# Altium PCB rad_detector_v500.PcbDoc
Units mil, origin at the board's own origin, x right, y up, seen from the top; angles counter-clockwise.
Board outline 2401.57 x 3149.61 mil, 2 copper layers (Top Layer, Bottom Layer), stack 64.611 mil thick; 105 components, 77 nets, 339 pads, 128 vias.
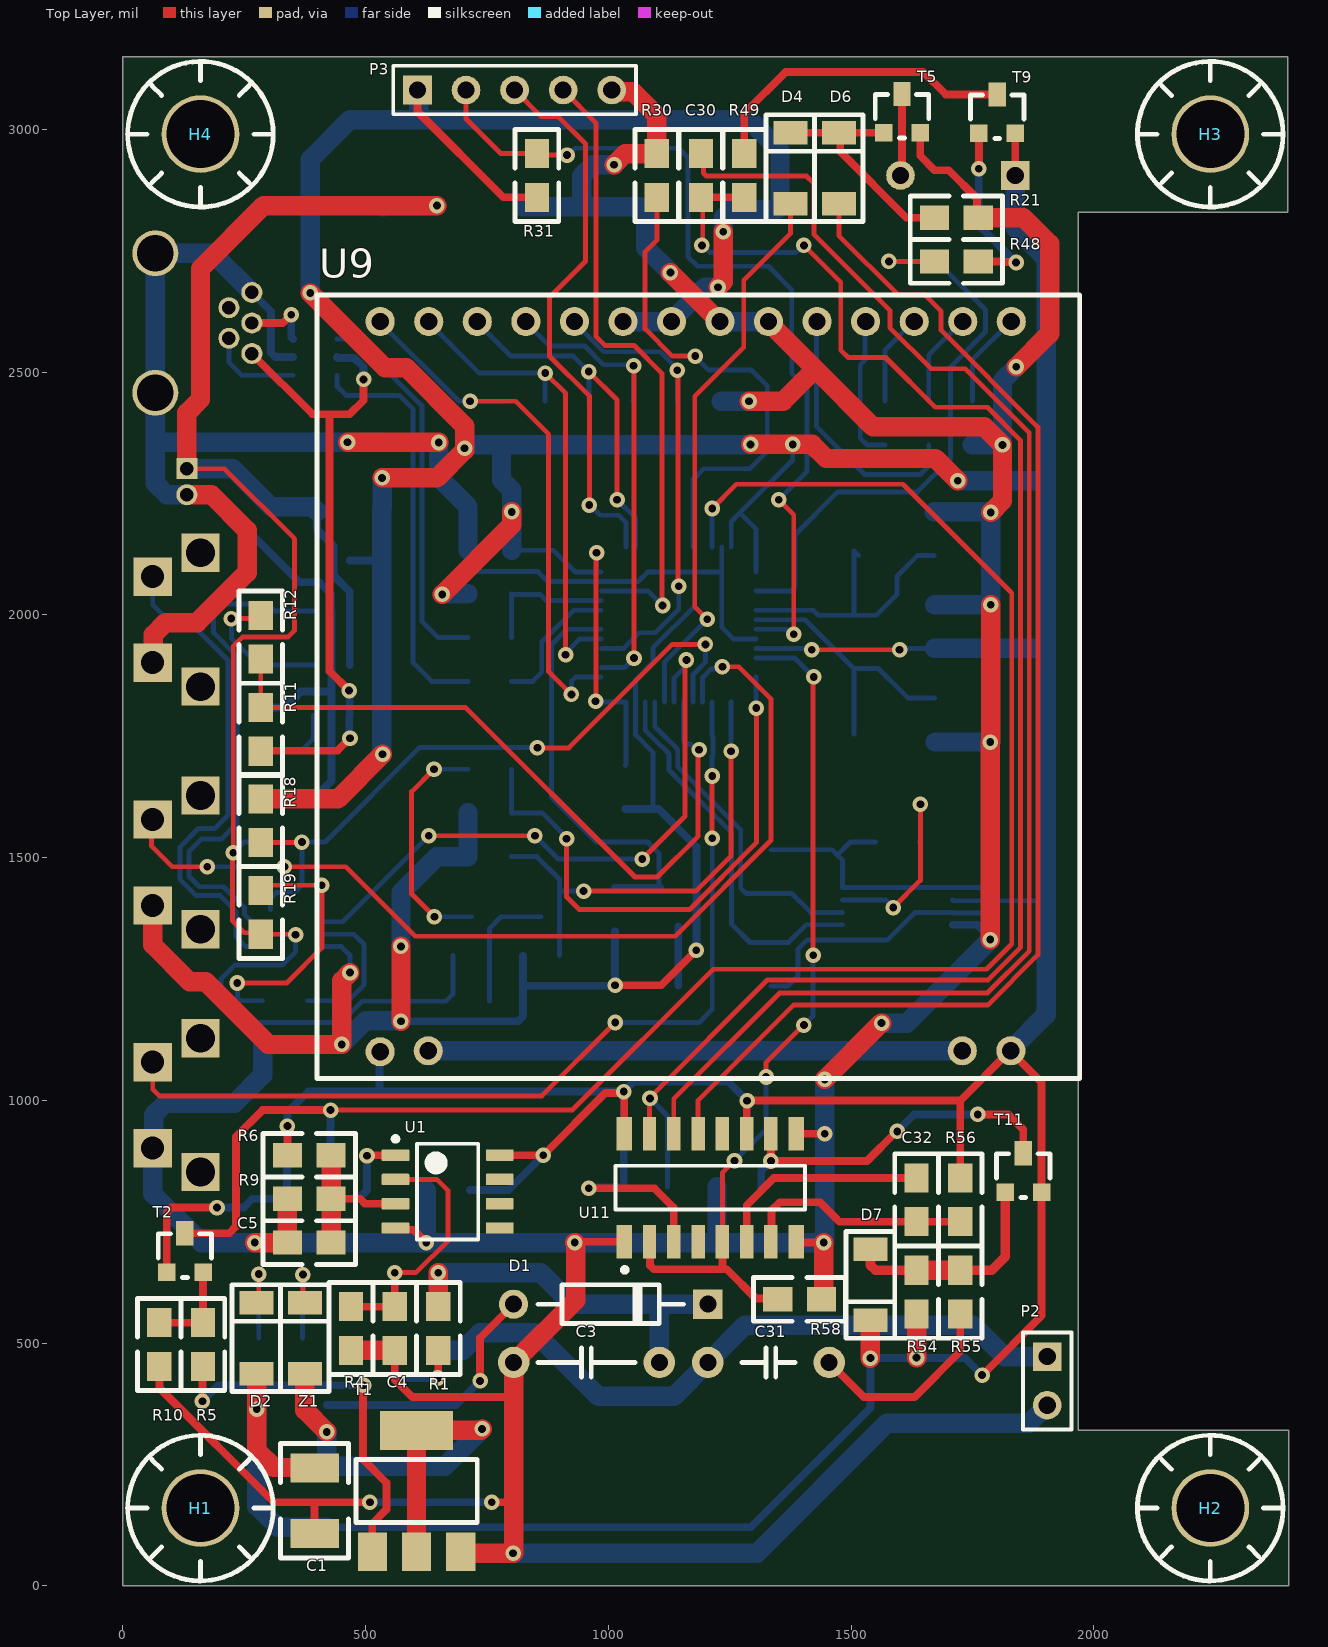
[diagram p0: Top Layer view]
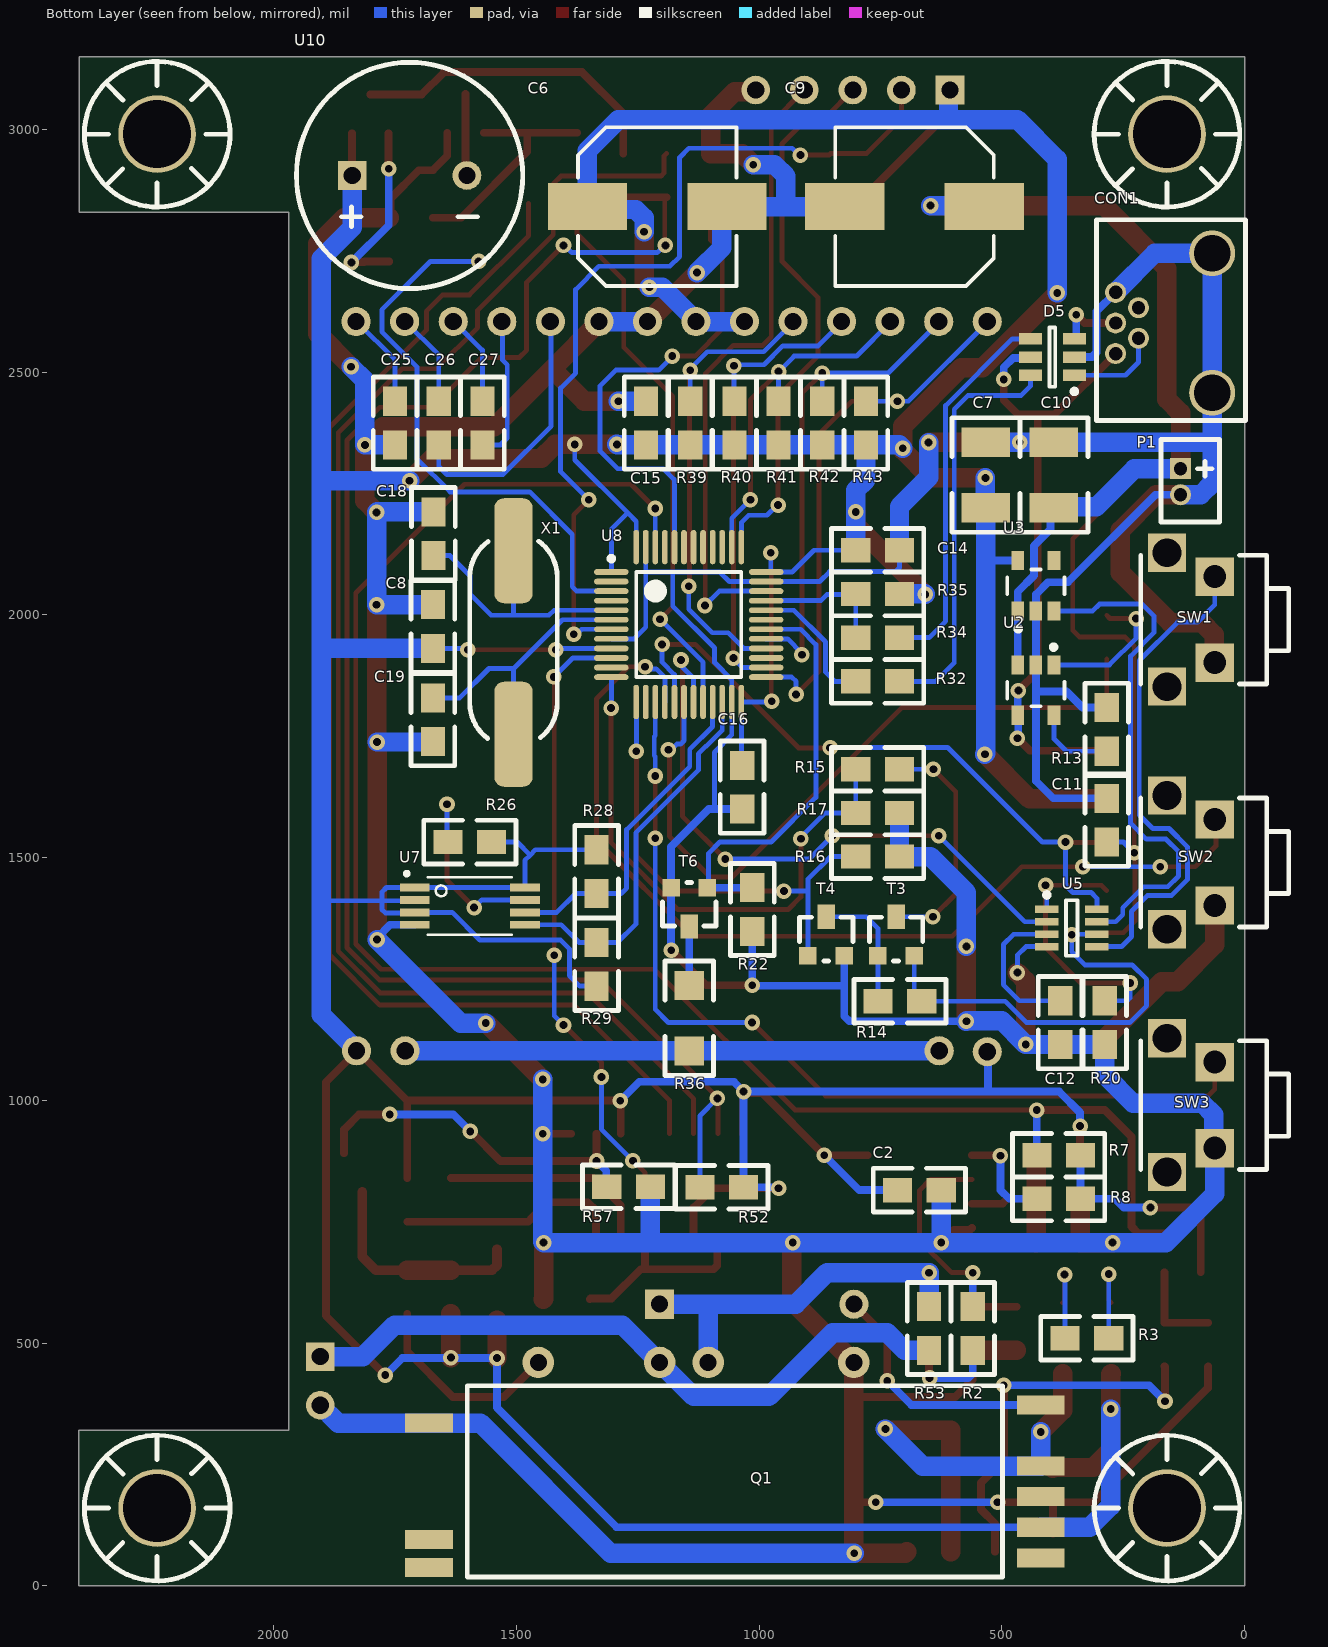
[diagram p1: Bottom Layer view, seen from below]
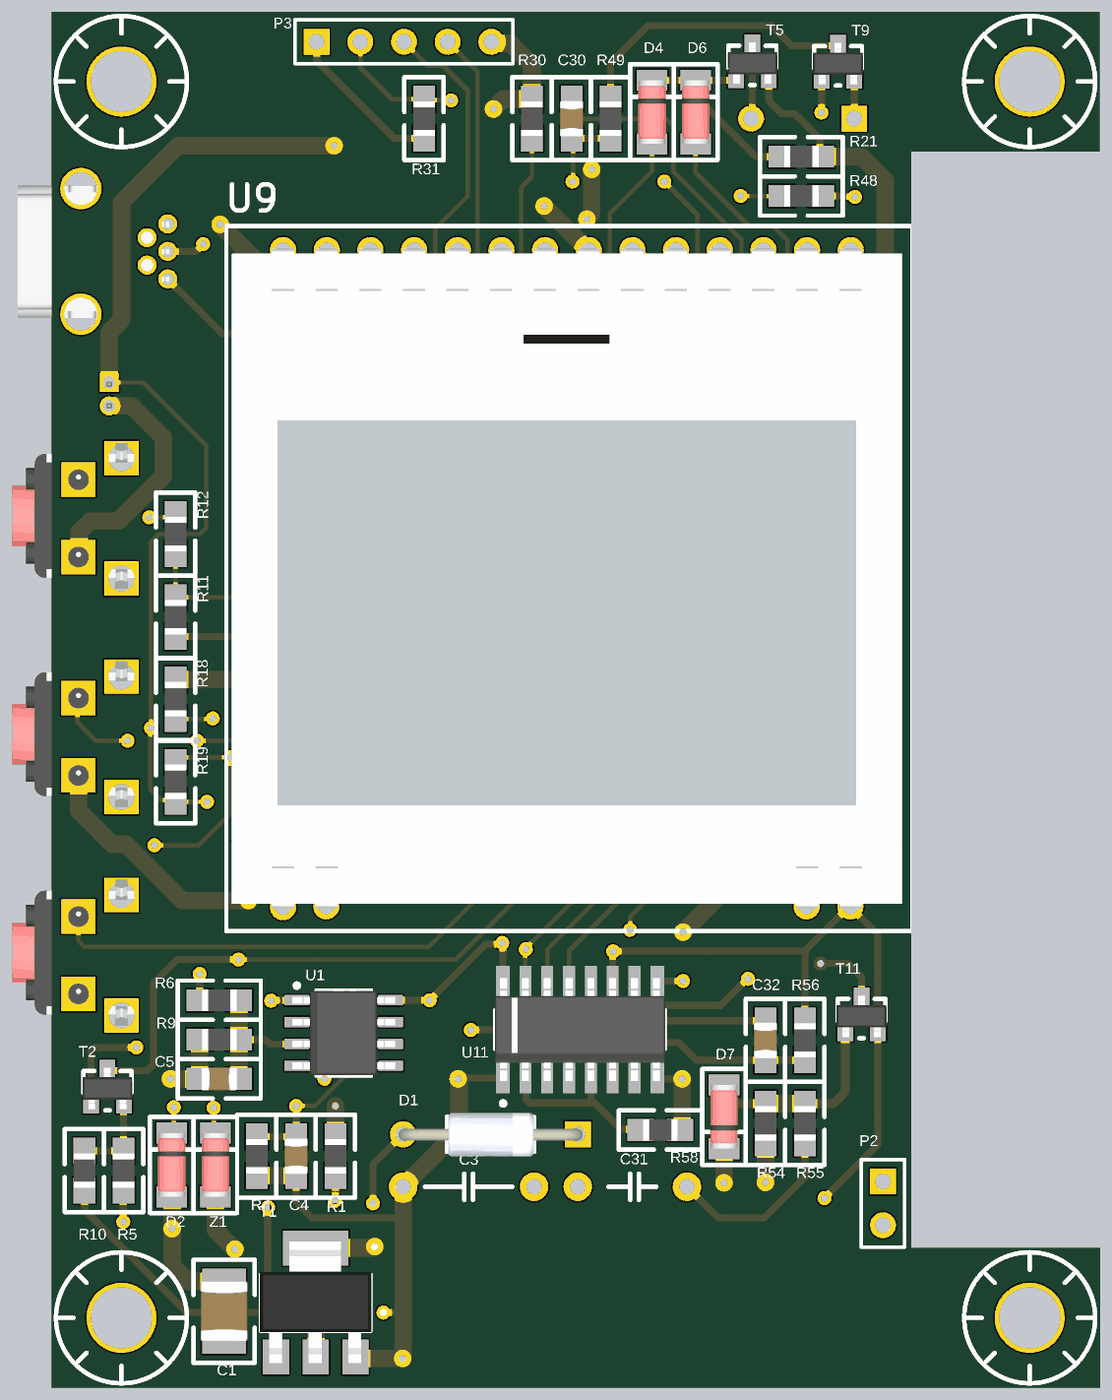
[diagram p2: 3D render of the assembled board from above, using the file's embedded part models]
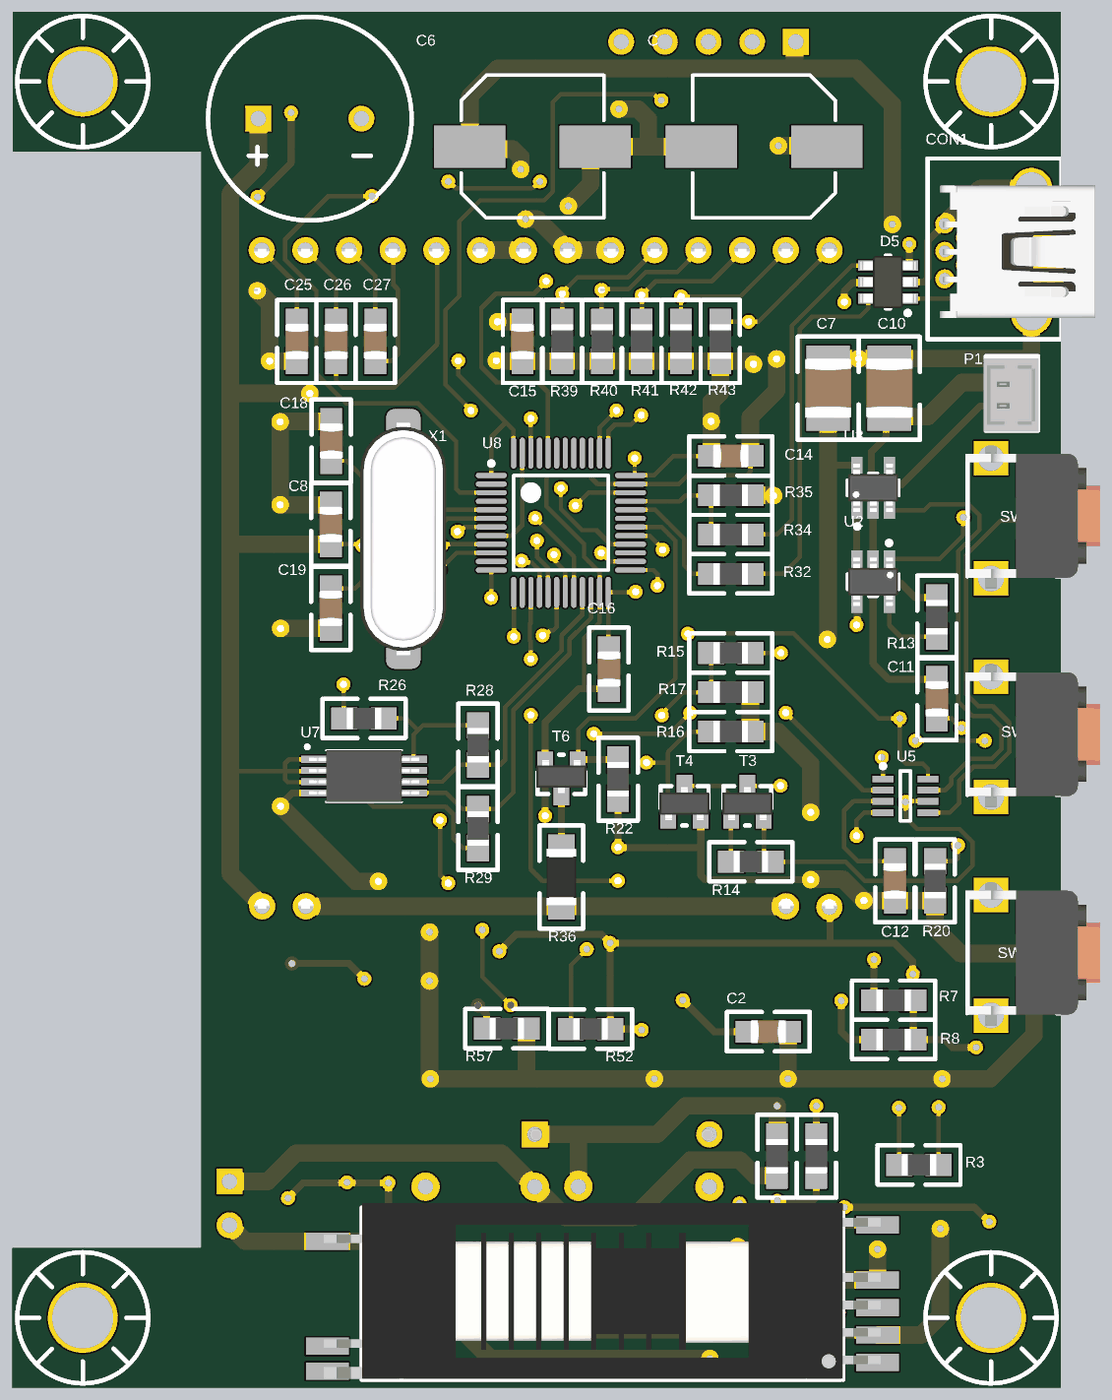
[diagram p3: 3D render of the assembled board from below, using the file's embedded part models]

## Layer stack, top to bottom
Top Solder: solder mask 0.4, Solder Resist, Dk 3.5
Top Layer: signal copper 1.4
Dielectric 1: dielectric 61.811, FR-4, Dk 4.8
Bottom Layer: signal copper 1.4
Bottom Solder: solder mask 0.4, Solder Resist, Dk 3.5

## Board outline
0,0 0,3149.61 2400,3149.61 2400,2829 1968.5,2829 1968.5,320 2401.57,320 2401.57,0

## Design rules (kind name [scope] priority, off if disabled: settings)
Clearance [All] p1: gap=10 ignorepadtopadclearanceinfootprint=FALSE except(0: THPad-Hole Via-Hole Fill-Hole Poly-Hole Region-Hole Text-Hole; 7.87: SMDPad-SMDPad SMDPad-THPad SMDPad-Via SMDPad-Fill SMDPad-Poly SMDPad-Region SMDPad-Text SMDPad-Hole; 8: Arc-Arc Arc-Track Arc-SMDPad Arc-THPad Arc-Via Arc-Fill Arc-Poly Arc-Region Arc-Text Arc-Hole Track-Track Track-SMDPad Track-THPad Track-Via Track-Fill Track-Poly Track-Region Track-Text Track-Hole)
HoleSize [All] p1: absolutevalues=TRUE maxlimit=248.03 minlimit=11.81 maxpercent=80.000 minpercent=20.000
PolygonConnect [All] p1: connectstyle=Relief reliefconductorwidth=10 reliefentries=4 polygonreliefangle="90 Angle" airgapwidth=10
RoomDefinition U_rad_detector_v500_PSU [InComponentClass('U_rad_detector_v500_PSU')] p1 off: confinementstyle=ConfineIn formatcopy=TRUE lockcomponents=FALSE outline 2543.23,5485.4 8643.23,5485.4 8643.23,6145.4 2543.23,6145.4
RoomDefinition U_rad_detector_v500_HV_PSU [InComponentClass('U_rad_detector_v500_HV_PSU')] p2 off: confinementstyle=ConfineIn formatcopy=TRUE lockcomponents=FALSE outline 2545,1518 7995,1518 7995,3008 2545,3008
RoomDefinition U_rad_detector_v500_CONN [InComponentClass('U_rad_detector_v500_CONN')] p3 off: confinementstyle=ConfineIn formatcopy=TRUE lockcomponents=FALSE outline 2555,548 7235,548 7235,1478 2555,1478
RoomDefinition U_rad_detector_v500_ANA [InComponentClass('U_rad_detector_v500_ANA')] p4 off: confinementstyle=ConfineIn formatcopy=TRUE lockcomponents=FALSE outline 2545,-32 6575,-32 6575,508 2545,508
RoomDefinition U_rad_detector_v500_MCU [InComponentClass('U_rad_detector_v500_MCU')] p5 off: confinementstyle=ConfineIn formatcopy=TRUE lockcomponents=FALSE outline 2545,3048 7285,3048 7285,3628 2545,3628
RoomDefinition U_rad_detector_v500_PERIPHERAL [InComponentClass('U_rad_detector_v500_PERIPHERAL')] p6 off: confinementstyle=ConfineIn formatcopy=TRUE lockcomponents=FALSE outline 2545,3668 10385,3668 10385,5418 2545,5418
RoutingVias [All] p1: holewidth=16 width=32 viastyle="Through Hole" minholewidth=16 minwidth=32 maxholewidth=16 maxwidth=32
SilkToSilkClearance [All] p1 off: silktosilkclearance=10
SolderMaskExpansion [All] p1: expansion=4 istentingtop=FALSE
Width [All] p1: maxlimit=40 minlimit=10 preferedwidth=16 minimp=50.000000 maximp=50.000000 favimp=50.000000
28 further rules are at their usual default settings.

## Classes and differential pairs
component class rad_detector_v500_MAIN: H1 H2 H3 H4
component class U_rad_detector_v500_PSU: C6 C7 C8 C9 C10 C11 C12 R11 R12 R13 R14 R15 R16 R17 R18 R19 R20 T3 T4 U2 U3 U5
component class U_rad_detector_v500_PERIPHERAL: C25 C26 C27 R21 R22 R36 R39 R40 R41 R42 R43 SW1 SW2 SW3 T5 T6 U9 U10
component class U_rad_detector_v500_MCU: C14 C15 C16 C18 C19 D4 R26 R28 R29 R30 R31 U7 U8 X1
component class U_rad_detector_v500_HV_PSU: C1 C2 C3 C4 C5 D1 D2 Q1 R1 R2 R3 R4 R5 R6 R7 R8 R9 R10 T1 T2 U1 Z1
component class U_rad_detector_v500_CONN: CON1 D5 P1 P2 P3 R32 R34 R35
component class U_rad_detector_v500_ANA: C30 C31 C32 D6 D7 R48 R49 R52 R53 R54 R55 R56 R57 R58 T9 T11 U11

## Components (designator, comment, footprint, x,y, rotation, side; value= is the part's Value field where it differs from the comment)
C1 "10uF" 1210_C 390,175 r270 top
C2 "100nF" 0805_C 670,815 r180 bottom
C3 "10nF" CAPACITOR_300MIL 955,460 r180 top
C4 "10nF" 0805_C 560,530 r270 top
C5 "100nF" 0805_C 384,707 r0 top
C6 "470uF" CAPAE9383X110M 1210,2841 r180 bottom
C7 "10uF" 1210_C 538,2288 r270 bottom
C8 "100nF" 0805_C 1672,1976 r270 bottom
C9 "470uF" CAPAE9383X110M 680,2841 r0 bottom
C10 "10uF" 1210_C 398,2288 r270 bottom
C11 "100nF" 0805_C 284,1577 r270 bottom
C12 "10uF" 0805_C 380,1160 r270 bottom
C14 "100nF" 0805_C 756,2133 r0 bottom
C15 "100nF" 0805_C 1233,2395 r90 bottom
C16 "100nF" 0805_C 1035,1645 r90 bottom
C18 "22pF" 0805_C 1671,2167 r90 bottom
C19 "22pF" 0805_C 1672,1784 r270 bottom
C25 "1uF" 0805_C 1750,2395 r90 bottom
C26 "1uF" 0805_C 1660,2395 r90 bottom
C27 "1uF" 0805_C 1570,2395 r90 bottom
C30 "100nF" 0805_C 1191,2905 r270 top
C31 "68pF" CAPACITOR_250MIL 1335,460 r0 top
C32 "10nF" 0805_C 1635,795 r270 top
CON1 "USB-MINI" USB-MINI 155,2604 r90 bottom
D1 "DIODE" DIODE_400MIL 1000,585 r180 top
D2 "DIODE" SMD_DIODE_SOD80 275,515 r270 top
D4 "DIODE" SMD_DIODE_SOD80 1375,2925 r270 top
D5 "USBLC6-2SC6" STM-SOT23-6L_V 396,2531 r0 bottom
D6 "DIODE" SMD_DIODE_SOD80 1475,2925 r270 top
D7 "DIODE" SMD_DIODE_SOD80 1540,615 r90 top
H1 "HOLE" HOLE_140_160MIL 160,165 r0 top
H2 "HOLE" HOLE_140_160MIL 2240,165 r0 top
H3 "HOLE" HOLE_140_160MIL 2240,2995 r0 top
H4 "HOLE" HOLE_140_160MIL 160,2995 r0 top
P1 "LP602945_CONN" LP602945_CONN 127,2276 r270 bottom
P2 "GM TUBE" HDR1X2 1904,472 r270 top
P3 "Header 5" HDR1X5 607,3081 r0 top
Q1 "DARFON_CCFL_TRANSFORMER" DARFON_CCFL_TRANSFORMER 1060.08,205.08 r0 bottom
R1 "30M" 0805 650,530 r90 top
R2 "30M" 0805 560,530 r270 bottom
R3 "150" 0805 325,510 r180 bottom
R4 "200k" 0805 470,530 r90 top
R5 "1k" 0805 165,497 r90 top
R6 "15k" 0805 384,887 r180 top
R7 "15k" 0805 383,887 r0 bottom
R8 "1k" 0805 383,797 r180 bottom
R9 "15k" 0805 384,797 r0 top
R10 "10k" 0805 75,497 r90 top
R11 "47k" 0805 284,1764 r270 top
R12 "91k" 0805 284,1954 r270 top
R13 "2k" 0805 284,1764 r90 bottom
R14 "10k" 0805 710,1204 r180 bottom
R15 "10k" 0805 756,1682 r180 bottom
R16 "10k" 0805 756,1502 r0 bottom
R17 "3.3k" 0805 756,1592 r0 bottom
R18 "10k" 0805 284,1576 r90 top
R19 "33k" 0805 284,1387 r270 top
R20 "10k" 0805 288,1160 r90 bottom
R21 "10k" 0805 1717,2818 r180 top
R22 "10k" 0805 1014,1393 r90 bottom
R26 "-" 0805 1596,1532 r0 bottom
R28 "10k" 0805 1335,1471 r90 bottom
R29 "10k" 0805 1335,1280 r270 bottom
R30 "100k" 0805 1100,2905 r270 top
R31 "10k" 0805 853,2905 r90 top
R32 "22" 0805 756,1863 r0 bottom
R34 "22" 0805 756,1953 r0 bottom
R35 "1.5k" 0805 756,2043 r0 bottom
R36 "22" 1206 1149,1174 r270 bottom
R39 "10k" 0805 1142,2395 r90 bottom
R40 "10k" 0805 1051,2395 r90 bottom
R41 "10k" 0805 960,2395 r90 bottom
R42 "10k" 0805 870,2395 r90 bottom
R43 "10k" 0805 780,2395 r90 bottom
R48 "36k" 0805 1717,2728 r0 top
R49 "220k" 0805 1280,2905 r90 top
R52 "220k" 0805 1077,821 r180 bottom
R53 "4.7M" 0805 650,530 r90 bottom
R54 "3.9k" 0805 1635,605 r90 top
R55 "100k" 0805 1725,605 r270 top
R56 "36k" 0805 1725,795 r90 top
R57 "10k" 0805 1269,822 r180 bottom
R58 "10k" 0805 1394,590 r180 top
SW1 "DTSA 62N" SW_DTSA-62N 160,1990 r90 bottom
SW2 "DTSA 62N" SW_DTSA-62N 160,1490 r90 bottom
SW3 "DTSA 62N" SW_DTSA-62N 160,990 r90 bottom
T1 "BCP54" SOT233-1 605,200 r0 top
T2 "BC848*" SOT23 128,680 r0 top
T3 "BSS84" SOT23 718,1332 r180 bottom
T4 "MMBF170" SOT23 862,1332 r180 bottom
T5 "MMBF170" SOT23 1605,3027 r0 top
T6 "MMBF170" SOT23 1144,1404 r0 bottom
T9 "BC856" SOT23 1801,3026 r0 top
T11 "BC856" SOT23 1855,845 r0 top
U1 "LM393D" SO-8 669,812 r0 top
U2 "MCP73832T-2ATI/OT" SOT23-5 430,1845 r270 bottom
U3 "MIC5504-3.3YM5-TR" SOT23-5 430,2060 r90 bottom
U5 "LTC2955CTS8-1#TRPBF" LT-TS8-8-TSOT-23_V 356,1355 r180 bottom
U7 "M24C02-DRDW8TP/K" TSSOP8 1596,1400 r180 bottom
U8 "STM32F103CBT6" STM-LQFP48_N 1145,1980 r180 bottom
U9 "EADOGS102W-6(with Backlight)" EADOGS102-6W 1191.57,1852.01 r0 top
U10 "HCM1212X" HCM1212X 1720,2905 r180 bottom
U11 "74HCT123" 74HCT123 1210,820 r90 top
X1 "XTAL" XTAL_SMD 1506,1943 r90 bottom
Z1 "DIODE_ZENER" SMD_DIODE_SOD80 375,515 r270 top

## Footprints (in the part's own frame and the unit in brackets; to place one, negate y for a bottom-side part, rotate by r counter-clockwise, add the part's x,y. Pads: shape width x height; smd on the part's side, far side on the other; paste and mask are expansions set on the pad)
74HCT123 [mm]
  rect 1.75x0.8 smd paste+0 mask+0: 1(-2.825,4.495) 8(-2.825,-4.495) 9(2.825,-4.495) 16(2.825,4.495)
  rect 1.75x0.7 smd paste+0 mask+0: 2(-2.825,3.175) 3(-2.825,1.905) 4(-2.825,0.635) 5(-2.825,-0.635) 6(-2.825,-1.905) 7(-2.825,-3.175) 10(2.825,-3.175) 11(2.825,-1.905) 12(2.825,-0.635) 13(2.825,0.635) 14(2.825,1.905) 15(2.825,3.175)
  silkscreen extent -4.42,-4.95 1.15,4.95, body extent -3,-4.95 3,4.95, height 1.76
0805 [mil]
  rect 60x50 smd: 1(-45,0) 2(45,0)
  silkscreen extent -95,-45 95,45, body extent -39,-25 39,25, height 24
0805_C [mil]
  rect 60x50 smd: 1(-45,0) 2(45,0)
  silkscreen extent -95,-45 95,45, body extent -41,-27 41,27, height 30
1206 [mil]
  rect 60x60 smd: 1(-62.5,5) 2(72.5,5)
  silkscreen extent -113,-45 123,55, body extent -60,-28 70,38, height 26
1210_C [mil]
  rect 60x100 smd: 1(-67.5,5) 2(67.5,5)
  silkscreen extent -118,-65 118,75, body extent -69,-48 69,58, height 57
CAPACITOR_250MIL [mil]
  round 65 hole 35: 1(-130,0) 2(120,0)
  silkscreen extent -60,-30 50,30
CAPACITOR_300MIL [mil]
  round 65 hole 35: 1(-150,0) 2(150,0)
  silkscreen extent -100,-30 100,30
CAPAE9383X110M [mm] "Aluminum Electrolytic Capacitor, Body 8,30x8,30x11,00mm, IPC Low Density"
  rect 4.15x2.45 smd: 1(-3.65,0) 2(3.65,0)
  silkscreen extent -4.15,-4.15 4.15,4.15, body extent -4.15,-4.15 4.15,4.15, height 11
DARFON_CCFL_TRANSFORMER [mm]
  rect 2.5x1 smd: 1(-16.254,3.746) 2(-16.254,2.146) 3(-16.254,0.546) 4(-16.254,-1.054) 5(15.746,2.796) 6(-16.254,-4.254) 7(15.746,-3.304) 8(15.746,4.246)
  silkscreen extent -14.25,-5.25 13.75,4.75, body extent -16.45,-5.51 15.95,4.7, height 5.22
DIODE_400MIL [mil]
  rect 60x60 / inner round 60 / far side rect 60x60 hole 35: 1(-205,5)
  round 60 hole 35: 2(195,5)
  silkscreen extent -155,-35 145,45, body extent -216,-43 205,55, height 101
EADOGS102-6W [mm]
  round 1.524 hole 0.9: 1(-16.8,-19.1) 2(-14.285,-19.05) 13(13.655,-19.05) 14(16.195,-19.05) 15(16.22,19.1) 16(13.68,19.1) 17(11.14,19.1) 18(8.6,19.1) 19(6.06,19.1) 20(3.52,19.1) 21(0.98,19.1) 22(-1.56,19.1) 23(-4.1,19.1) 24(-6.64,19.1) 25(-9.18,19.1) 26(-11.72,19.1) 27(-14.26,19.1) 28(-16.8,19.1)
  silkscreen extent -20.1,-20.5 19.8,20.5, body extent -19.8,-19.2 19.5,19.2, height 5.6
HCM1212X [mm]
  rect 1.5x1.5 hole 0.9: 1(-3,0)
  round 1.5 hole 0.9: 2(3,0)
  silkscreen extent -5.92,-5.92 5.92,5.92, body extent -5.92,-5.92 5.92,5.92, height 8.92
HDR1X2 [mm] "Connector; Header; 2 Position"
  rect 1.5x1.5 hole 0.9: 1(0,0)
  round 1.5 hole 0.9: 2(2.54,0)
  silkscreen extent -1.27,-1.27 3.81,1.27
HDR1X5 [mm] "Connector; Header; 5 Position"
  rect 1.5x1.5 hole 0.9: 1(0,0)
  round 1.5 hole 0.9: 2(2.54,0) 3(5.08,0) 4(7.62,0) 5(10.16,0)
  silkscreen extent -1.27,-1.27 11.43,1.27
HOLE_140_160MIL [mil]
  round 160 hole 140 unplated: 1(0,-5)
  silkscreen extent -150,-155 150,145
LP602945_CONN [mm]
  rect 1.1x1.1 hole 0.7: 1(-0.635,-0.127)
  round 1.1 hole 0.7: 2(0.727,-0.127)
  silkscreen extent -2.16,-1.14 2.16,1.91, body extent -2.03,-1.27 2.22,1.93, height 4.21
LT-TS8-8-TSOT-23_V [mm] "SOT23, 8-Leads, Body 2.9x1.75mm, Pitch 0.65mm"
  rect 1.22x0.4 smd: 1(-1.31,0.975) 2(-1.31,0.325) 3(-1.31,-0.325) 4(-1.31,-0.975) 5(1.31,-0.975) 6(1.31,-0.325) 7(1.31,0.325) 8(1.31,0.975)
  silkscreen extent -1.43,-1.45 0.3,1.85, body extent -0.87,-1.45 0.88,1.45, height 1
SMD_DIODE_SOD80 [mil]
  rect 48x70 smd: 1(-68,0) 2(78,0)
  silkscreen extent -105,-50 115,50, body extent -68,-32 78,32, height 63
SO-8 [mm] "SOIC, 8-Leads, Body 5x4mm, Pitch 1.27mm, IPC Medium Density"
  rrect17% 1.45x0.6 smd: 1(-2.725,1.905) 2(-2.725,0.635) 3(-2.725,-0.635) 4(-2.725,-1.905) 5(2.725,-1.905) 6(2.725,-0.635) 7(2.725,0.635) 8(2.725,1.905)
  silkscreen extent -2.85,-2.5 1.6,2.88, body extent -3,-2.45 3,2.45, height 1.63
SOT23 [mil]
  rect 36x36 smd: 1(-37.5,-34) 2(37.5,-34)
  rect 36x50 smd: 3(0,46)
  silkscreen extent -55,-45 55,45, body extent -57,-42 57,52, height 44
SOT23-5 [mm]
  rect 1x0.66 smd paste+0 mask+0: 1(-1.315,0.95) 2(-1.315,0) 3(-1.315,-0.95) 4(1.315,-0.95) 5(1.315,0.95)
  silkscreen extent -2.37,-1.5 0.85,1.5, body extent -1.4,-1.45 1.4,1.45, height 1.45
SOT233-1 [mil]
  rect 60x80 smd: 1(-91,-130) 2(0,-130) 3(91,-130)
  rect 150x80 smd: 4(0,120)
  silkscreen extent -125,-70 125,60, body extent -128,-144 128,135, height 63
STM-LQFP48_N [mm] "QFP, 48-Leads, Body 7x7mm, Pitch 0.5mm, IPC Medium Density"
  oval 1.8x0.3 smd: 1(-4.05,2.75) 2(-4.05,2.25) 3(-4.05,1.75) 4(-4.05,1.25) 5(-4.05,0.75) 6(-4.05,0.25) 7(-4.05,-0.25) 8(-4.05,-0.75) 9(-4.05,-1.25) 10(-4.05,-1.75) 11(-4.05,-2.25) 12(-4.05,-2.75) 25(4.05,-2.75) 26(4.05,-2.25) 27(4.05,-1.75) 28(4.05,-1.25) 29(4.05,-0.75) 30(4.05,-0.25) 31(4.05,0.25) 32(4.05,0.75) 33(4.05,1.25) 34(4.05,1.75) 35(4.05,2.25) 36(4.05,2.75)
  oval 0.3x1.8 smd: 13(-2.75,-4.05) 14(-2.25,-4.05) 15(-1.75,-4.05) 16(-1.25,-4.05) 17(-0.75,-4.05) 18(-0.25,-4.05) 19(0.25,-4.05) 20(0.75,-4.05) 21(1.25,-4.05) 22(1.75,-4.05) 23(2.25,-4.05) 24(2.75,-4.05) 37(2.75,4.05) 38(2.25,4.05) 39(1.75,4.05) 40(1.25,4.05) 41(0.75,4.05) 42(0.25,4.05) 43(-0.25,4.05) 44(-0.75,4.05) 45(-1.25,4.05) 46(-1.75,4.05) 47(-2.25,4.05) 48(-2.75,4.05)
  silkscreen extent -4.18,-2.75 2.75,3.57, body extent -4.45,-4.53 4.55,4.47, height 1.5
STM-SOT23-6L_V [mm] "SOT23, 6-Leads, Body 3.05x1.75mm, Pitch 0.95mm"
  rect 1.2x0.6 smd: 1(-1.15,0.95) 2(-1.15,0) 3(-1.15,-0.95) 4(1.15,-0.95) 5(1.15,0) 6(1.15,0.95)
  silkscreen extent -1.27,-1.55 0.15,1.92, body extent -1.6,-1.53 1.6,1.53, height 1.45
SW_DTSA-62N [mm]
  rect 2x2 hole 1.2: 1(-2.25,-2.5) 2(2.25,-2.5)
  rect 2x2 hole 1.5: 3(3.5,0) 4(-3.5,0)
  silkscreen extent -3.37,-6.37 3.37,1.37, body extent -4.1,-6.35 4.4,1.5, height 7.2
TSSOP8 [mm]
  rect 1.56x0.41 smd: 1(-2.88,0.975) 2(-2.88,0.325) 3(-2.88,-0.325) 4(-2.88,-0.975) 5(2.88,-0.975) 6(2.88,-0.325) 7(2.88,0.325) 8(2.88,0.975)
  silkscreen extent -3.4,-1.5 2.2,1.8, body extent -3.2,-1.5 3.2,1.5, height 1.2
USB-MINI [mm]
  round 1.1 hole 0.7: 1(-1.673,2.816) 2(-0.873,1.616) 3(-0.073,2.816) 4(0.727,1.616) 5(1.527,2.816)
  round 2.4 / inner round 1.524 / far side round 2.4 hole 1.9: 6(-3.723,-2.234) 7(3.577,-2.234)
  silkscreen extent -5.18,-3.99 5.33,3.82, body extent -3.94,-5.9 3.76,3.1, height 3.9
XTAL_SMD [mm]
  rrect50% 5.5x2 smd: 1(-4.8,0) 2(4.8,0)
  silkscreen extent -5.02,-2.29 5.3,2.29, body extent -6.75,-2.5 6.75,2.5, height 4.3

## Part data
C1 C2 C3 C4 C5 C7 C8 C10 C11 C12 C14 C15 C16 C18 C19 C25 C26 C27 C30 C31 C32: library part CAPACITOR
C6 C9: library part CAPACITOR_ELCO
D5: "Very low capacitance ESD protection, 3.5 pF, -40 to 125 degC, 6-Pin SOT23, RoHS, Tape and Reel", Capacitance Value=3.5pF, Clamping Voltage=17V, Leakage Current=0.15uA, Manufacturer=STMicroelectronics, Operating Temp Range=-40Cto125C, Operating Temperature Classification=Automotive, Operating Temperature Max Deg. C=125C, Operating Temperature Min Deg. C=-40C, Package / Case=SOT-23, Package Description="6-Pin Small Outline Transistor, Body 2.925 x 1.625 mm, Pitch 0.95 mm", Package Reference=SOT23-6L, Peak Pulse Current=5A, Reverse Breakdown Voltage=6V, Reverse Stand-off Voltage=5V, Test Current (It)=1mA, Clamping Voltage (Max)=17V, Configuration=Dual, Datasheet URL=http://www.st.com/st-web-ui/static/active/en/resource/technical/document/datasheet/CD00050750.pdf, Datasheet Version="Rev. 5, 10/2011", Direction Type=Uni-Directional, Leakage Current (Max)=0.15uA, Manufacturer URL=http://www.st.com/, Mounting=SurfaceMount, Mounting Style=SurfaceMount, Number of Elements=1, Packaging=TapeandReel, Pin Count=6, Polarity=Uni-Directional, Product Depth (mm)=1.75mm, Product Height (mm)=1.3mm, Product Length (mm)=3.05mm, Rad Hardened=No, Suppressor Type=DiodeArrays, Working Voltage=5V, Working Voltage (Max)=5V
P2: library part "Header 2", "Header, 2-Pin", LatestRevisionDate=17-Jul-2002, LatestRevisionNote="Re-released for DXP Platform.", Publisher="Altium Limited"
P3: "Header, 5-Pin", LatestRevisionDate=17-Jul-2002, LatestRevisionNote="Re-released for DXP Platform.", Publisher="Altium Limited"
R1 R2 R3 R4 R5 R6 R7 R8 R9 R10 R11 R12 R13 R14 R15 R16 R17 R18 R19 R20 R21 R22 R26 R28 R29 R30 R31 R32 R34 R35 R36 R39 R40 R41 R42 R43 R48 R49 R52 R53 R54 R55 R56 R57 R58: library part RESISTOR, Parameter 1=10k
SW1 SW2 SW3: library part "SW_DTSA 62N"
T2: library part TRANSISTOR_NPN
T3: "P-Chanel MOSFET"
T4 T5 T6: "N MOSFET"
T9 T11: library part TRANSISTOR_PNP
U1: "IC VOLT COMPARATOR DUAL LP 8SOIC", Ambient Temperature Range High=+70°C, Ambient Temperature Range Low=0°C, Input Bias Current=0.02uA, Input Offset Voltage=1mV, Manufacturer=STMicroelectronics, Max Dual Supply Voltage=18V, Max Junction Temp=+150°C, Max Supply Voltage=36V, Min Dual Supply Voltage=1V, Min Supply Voltage=2V, Nominal Supply Current=0.45-0.6mA, Output Current per Channel=18mA, Package=SO8, Temperature="0°C to +70°C", Voltage Gain=200V/mV, Automotive=No, Category=IC, ComponentLink2Description=Datasheet, ComponentLink2URL=https://www.st.com/resource/en/datasheet/lm393.pdf, Device Class L1="Integrated Circuits (ICs)", Device Class L2="Linear ICs", Device Class L3=Comparators, Digikey Description="IC VOLT COMPARATOR DUAL LP 8SOIC", Footprint Url=https://www.st.com/resource/en/datasheet/stm8l001j3.pdf, Height=1.75mm, Lead Free=Yes, Manufacturer Part Number=LM393D, Mouser Description="Analog Comparators Lo-Pwr Dual Voltage", Number of Channels=2, Octopart=https://octopart.com/lm393d-stmicroelectronics-25832, Response Time=1.3us, RoHS=TRUE, Standoff Height=0.1mm, Temperature Range High=+70°C, Temperature Range Low=0°C
U2: "Miniature Single-Cell, Fully Integrated Li-Ion, Li-Polymer Charge Management Controller, 4.2V, 5-Pin SOT-23, Industrial Temperature, Tape and Reel"
U5: library part LTC2955CTS8-1, "Pushbutton On / Off Controller with Automatic Turn-On, 8-pin SOT23 (TS8-8), 0 to 70 degC, Pb-Free, Tape and Reel"
U7: library part M24C02-FDW6TP, "EEPROM Memory IC 2Kb (256 x 8) I2C 400kHz 900ns 8-TSSOP", Package="TSSOP-8 STMicroelectronics", Digi-Key_Part_Number=497-15746-1-ND, MF=STMicroelectronics, MP=M24C02-FDW6TP, SnapEDA_Link=https://www.snapeda.com/parts/M24C02-FDW6TP/STMicroelectronics/view-part/1102461/?ref=snap
U8: "ARM Cortex-M3 32-bit MCU, 128 KB Flash, 20 KB Internal RAM, 37 I/Os, 48-pin LQFP, -40 to 85 degC, Tray", I/Os (High Current)=37, Operating Frequency(F) (Processor speed) (MHz)=72, Supply Voltage(Vcc) min (V)=2, A/D Converter="2x12-bit (10 Channel)", ComponentLink1Description="Manufacturer URL", ComponentLink1URL=http://www.st.com/web/en/home.html, ComponentLink2Description=Datasheet, ComponentLink2URL=http://www.st.com/st-web-ui/static/active/en/resource/technical/document/datasheet/CD00161566.pdf, ComponentLink3Description="Package Specification", ComponentLink3URL=http://www.st.com/st-web-ui/static/active/en/resource/technical/document/datasheet/DM00058181.pdf, Core="ARM Cortex-M3", DatasheetVersion="Rev. 16", FLASH Size (Prog) (kB)=128, Internal RAM Size (kB)=20, Mounting Technology="Surface Mount", PackageDescription="48-Pin Low Profile Quad Flat Package, 7 x 7 mm Body, 0.5 mm Pitch", PackageReference=LQFP48, PackageVersion="Rev. 6, 06/2013", Packing=Tray, PartNumber=STM32F103CBT6

## Via types
v1: diameter 32, hole 16, Top Layer to Bottom Layer, 125 vias
v2: diameter 32, hole 16, Top Layer to Bottom Layer, tented both sides, 3 vias

## Nets (pads, with @x,y where several pads share a name; then routed paths per layer and width w, separated by ;. In a path a pad name is that pad's centre, name@x,y a point inside that pad or via, vN(x,y) a via of type N, cw(c..) or ccw(c..) an arc to the next point about the centre after c; other vN are vias at no path point)
+3.3V: C1.1 C2.1 C6.1 C7.2 C8.2 C14.2 C15.1 C16.2 D2.2 D7.1 P3.1 Q1.2 R6.2 R18.2 R26.1 R28.2 R29.2 R31.1 R35.1 R39.1 R40.1 R41.1 R42.1 R43.1 R52.2 R54.1 R56.2 T9.2 T11.2 U1.8 U3.5 U7.1 U7.2 U7.3 U7.8 U8.1 U8.9 U8.24 U8.36 U8.48 U9.1 U9.14 U9.22 U9.23 U10.1 U11.3 U11.11 U11.16 | length 16974.5
  Top Layer w10: v1(973.94,1821.95) 974.97,1822.98 974.97,2126.97 v1(976,2128) ; v1(1419,1928) v1(1600,1928)
  Top Layer w16: R6.2 v1(339,947) ; P3.1 607.15,3080.84 607.15,3036.84 784,2860 R31.1 ; U1.8 v1(866,887) 993.94,1014.94 1028.94,1014.94 v1(1032,1018) 1033.03,1016.97 U11.16 ; v1(960,819) 1095,819 1135,779 U11.3 ; U11.11 v1@1285,999 ; v1(1286,999) 1286.4,999.4 1725,999.4 ; R56.2 1725,999.4 ; v1(1770,434) 1892.5,556.5 T11.2 1892.5,1037.1 1827.6,1102 1725,999.4 ; U10.1 1838.5,2905.39 T9.2
  Top Layer w40: D2.2 276,436 276,279 311.32,243.68 393.82,243.68 C1.1 ; R18.2 443,1621 v1(535,1713) ; v1(386,2663) 540,2509 584,2509 704,2389 v1(704,2343) 704,2339.12 646.88,2282 v1(534,2282) ; v1(658,2042) 801,2185 v1(801,2212) ; v1(1226,2675) 1237,2686 v1(1237,2789) ; v1(1293,2351) 1420,2351 1449,2322 1674,2322 v1(1720,2276) ; v1(1540,469) D7.1 ; v1(1635,470) R54.1
  Bottom Layer w10: R35.1 R35.1@714.14,2046.14 ; C14.2 887,2133 931.73,2088.27 U8.36@976.84,2088.27 ; v1(973.94,1821.95) 975.35,1820.55 U8.24 1036.73,1691.73 C16.2 ; v1(976,2128) 976,2089.1 U8.36@976.84,2088.27 ; U8.36 U8.36@976.84,2088.27 ; U8.48 1253.27,2192.27 1271,2210 ; U8.9 1416.21,1930.79 v1(1419,1928) ; U8.1 1304.45,2176.55 1271,2210 ; R29.2 1335.14,1235.14 1369.14,1235.14 1391,1257 1391,1312 1409,1330 1575,1330 1632.2,1387.2 U7.3 1710.59,1386 1770,1386 1777,1393 1777,1411 ; R28.2 1461,1516 1471.81,1505.19 ; v1(1380,2351) 1380,2319 1271,2210 ; R26.1 1498.61,1532 1471.81,1505.19 ; v1(1600,1928) 1603,1931 C8.2 ; U7.2 1711.18,1411 1777,1411 ; 1902,1409 1900,1411 1777,1411 ; 1471.81,1505.19 1482.61,1494.39 U7.8 U7.1 1767.61,1438.39 1777,1429 1777,1411
  Bottom Layer w16: v1(339,947) 339,975 382,1018 526,1018 ; Q1.2 1293.59,120.59 1540,367 v1(1540,469) 1735,469 v1(1770,434) ; U3.5 529.23,2111.77 533,2108 ; U9.1@528.58,1100.03 528.58,1020.58 526,1018 ; C2.1 794,815 v1(866,887) ; v1(960,819) 962,821 R52.2 v1(1032,1018) ; v1(1286,999) 1247,1038 1052,1038 v1(1032,1018) ; 526,1018 v1(1032,1018)
  Bottom Layer w40: v1(276,364) 276,164 319.41,120.59 Q1.2 ; v1(386,2663) 386,2938 468,3020 610,3020 ; v1(534,2282) 534,2221.5 C7.2 533,2108 533,1715 v1(535,1713) ; P3.1 609.95,3078.05 609.95,3020.05 610,3020 ; v1(658,2042) 659,2043 R35.1 ; v1(704,2343) 711,2350 R43.1 ; C14.2 v1(801,2212) 801,2257 780,2278 R43.1 ; U9.23@1028.58,2603.97 1128.58,2603.97 1199.61,2675 v1(1226,2675) ; v1(1237,2789) 1237,2817.57 1254.43,2835 1347.7,2835 C6.1 1353.7,2956.3 1290,3020 610,3020 ; v1(1293,2351) 1292,2350 C15.1 R39.1 R40.1 R41.1 R42.1 R43.1 ; C8.2 1901,1931 1902,1930 ; v1(1720,2276) 1899,2276 1902,2273 ; U9.14@1827.6,1102 1902,1176.4 1902,1409 1902,1930 ; U10.1 1838.11,2797.89 1902,2734 1902,2273 ; 1902,1930 1902,2273
+400V: C3.1 D1.1 R1.2 R53.2 | length 849
  Top Layer w40: R1.2 v2(650,645)
  Bottom Layer w40: R53.2@655,580 R53.2 v2(650,645) 860,645 925,580 1105,580 ; C3.1 1105,580 ; D1.1 1105,580
+VBAT: C9.1 C10.2 C11.2 P1.1 R14.2 R19.2 T3.2 U2.3 U3.1 U5.6 | length 4020.5
  Top Layer w10: P1.1 209.35,2301 354,2156.35 354,1968 340,1954 246,1954 227.48,1935.48 v1(227.48,1510) ; v1@226.14,1506.86 226.14,1368.86 249.86,1345.14 280.86,1345.14 R19.2 355,1342 v1(356,1341)
  Top Layer w40: P1.1 132,2416 160,2444 160,2713 290,2843 v1(647,2843)
  Bottom Layer w10: v1(227.48,1510) 249.48,1532 C11.2 ; U5.6 354.8,1342.2 v1(356,1341) 356,1306 329,1279 231.99,1279 202,1249.01 202,1195 237,1160 449,1160 493,1204 R14.2 680.5,1219.5 T3.2
  Bottom Layer w16: C10.2@400.13,2213.37 400.13,2175.87 434,2142 434,2081 467.4,2047.6 U3.1 U2.3
  Bottom Layer w40: P1.1 227,2301 305.32,2222.68 390.82,2222.68 C10.2@400.13,2213.37 ; C9.1 538.3,2843 v1(647,2843)
+VUSB: CON1.1 D5.5 R11.2 U2.4 | length 1305.7
  Top Layer w16: CON1.1 391,2413 426,2413 ; R11.2 285,1720 442,1720 v1(468,1746) ; v1(466,1844) 426,1884 426,2413 ; v1(496,2485) 496,2442 467,2413 426,2413
  Bottom Layer w16: D5.5 443.1,2529.18 476.82,2529.18 496,2510 v1(496,2485) ; v1(466,1844) 467.4,1842.6 U2.4 466.51,1792.33 466.51,1747.49 v1(468,1746)
BACKLIGHT_DIMM: R22.2 T6.1 U8.30 | length 863.3
  Bottom Layer w10: U8.30 914.61,1970.16 883,1938.54 883,1624 975,1532 1080.84,1532 1104.6,1508.24 1104.6,1439.9 T6.1
  Bottom Layer w16: R22.2 T6.1
BOOT0: R30.2 U8.44 | length 1032.5
  Top Layer w10: R30.2 1100,2772 1076,2748 1076,2589 1132,2533 v1(1179,2533)
  Bottom Layer w10: U8.44 1174.53,2278.53 1197,2301 1291.54,2301 1327.5,2336.96 1327.5,2471.5 1295,2504 1207,2504 1179,2532 v1(1179,2533)
BTN_CLEAR: SW2.2 U8.16 | length 2009.9
  Top Layer w10: SW2.2 59,1576.01 59,1524 102,1481 v1(174,1481) ; v1(333,1481) 459,1481 602,1338 1137.91,1338 1335,1535.09 1335,1827 1269,1893 v1(1235,1893)
  Bottom Layer w10: v1(174,1481) v1(333,1481) ; U8.16 1194.21,1870.98 1212.02,1888.79 1230.79,1888.79 v1(1235,1893)
BTN_UP_DOWN: SW3.2 U8.15 | length 1923.3
  Top Layer w10: SW3.2 61.57,1022.43 75,1009 863.24,1009 v1(1014.52,1160.28) ; v1(1214,1540) v1(1214,1668)
  Bottom Layer w10: v1(1014.52,1160.28) 1187.28,1160.28 1214.14,1187.14 v1@1214.14,1540 ; U8.15 1213.9,1751.14 1216,1749.04 1216,1709.99 1213.9,1707.89 1213.9,1668.1 v1(1214,1668)
FB_REFERENCE: C5.2 R6.1 R9.2 U1.3 | length 316.9
  Top Layer w16: R9.2 489,797 499,787 U1.3
  Top Layer w40: C5.2 R9.2 R6.1
FLYBACK_CONTROLL: R5.2 R10.2 T2.2 | length 194.2
  Top Layer w16: R10.2 R5.2 165,645.5 T2.2
GND: C1.2 C2.2 C3.2 C4.2 C5.1 C6.2 C7.1 C8.1 C9.2 C10.1 C11.1 C12.2 C14.1 C15.2 C16.1 C18.2 C19.2 C25.1 CON1.5 CON1.6 CON1.7 D5.2 P1.2 P2.2 P3.5 Q1.7 R4.1 R9.1 R10.1 R13.2 R16.1 R17.1 R20.1 R21.1 R22.1 R30.1 R57.2 R58.1 SW1.1 SW2.1 SW3.1 T1.3 T4.2 T5.2 T6.2 U1.4 U2.2 U3.2 U5.4 U7.4 U8.8 U8.23 U8.35 U8.47 U9.20 U9.21 U11.1 U11.8 U11.9 | length 18952.2
  Top Layer w16: R10.1 75.63,451.37 75.63,407.37 311,172 395,172 ; C1.2 395,171 396,172 v1(509,172) ; C4.2 560,425 596,389 805,389 ; U1.4 565.53,733.19 598.81,733.19 v1(625,707) ; v1(760,172) 803,172 805,170 ; v1(931,707) 932.78,708.78 U11.1 ; v1(1014,1237) 1109,1237 v1(1181,1309) ; U11.8 1388.75,707 v1(1444,707) ; U11.9 1387.19,931 v1(1446,931) ; T5.2 1642.5,2945.5 1672,2916 1701,2916 1759.37,2857.63 R21.1@1759.37,2820.63
  Top Layer w40: SW2.1 61.57,1320.43 138,1244 171,1244 300,1115 v1(451,1115) 451,1246 v1(468,1263) ; SW1.1 63,1902.84 63,1959 88,1984 153,1984 256,2087 256,2174 182.64,2247.36 P1.2 ; v1(272,707) C5.1 R9.1 ; v1(463,2355.5) 650.5,2355.5 v1(651,2355) ; R4.1 C4.2 ; v1(573,1163) v1(573,1317) ; T1.3 699,67 v1(804,67) 805,68 805,170 805,389 C3.2 933,588 933,705 v1(931,707) ; P3.5 1010.31,3077.69 1050.31,3077.69 1100,3028 R30.1 1035,2950 v1(1012,2927) ; v1(1128,2705) 1128,2704.55 U9.21@1228.58,2603.97 ; v1(1290,2440) 1360,2440 1426.28,2506.28 ; U9.20@1328.58,2603.97 1426.28,2506.28 ; v1(1444,707) 1444,591 R58.1@1445,590 ; v1(1446,1043) 1562,1159 v1(1563,1159) ; R21.1 1855,2818 1909,2764 1909,2579.4 v1(1840.51,2510.92) ; v1(1787,1331) v1(1787,1738) 1788,1739 v1(1788,2021) ; v1(1788,2211) 1812,2235 v1(1812,2350) 1775,2387 1545.55,2387 1426.28,2506.28
  Bottom Layer w10: U5.4 450.39,1316.61 468,1299 v1(468,1263) ; C14.1 711,2097.11 719.11,2089 855,2089 875.42,2068.58 U8.35 1061.58,2068.58 1081,2088 1178,2088 ; 1092,1600 1092,1717 1056.42,1752.58 U8.23 1056.42,1866.42 1092,1902 1092,1932 1178,2018 1178,2088 ; U8.47 1233.58,2088 ; U8.8 1257.53,1950.47 1233.58,1974.42 1233.58,2088 ; 1178,2088 1233.58,2088
  Bottom Layer w16: P1.2 183.64,2247.36 364,2067 405,2067 429.58,2042.42 429.58,2008.65 U3.2 U2.2 430,1837 ; CON1.5 305,2624.98 305,2540.37 314.37,2531 D5.2 ; C11.1 394,1622 430,1658 430,1837 ; R13.2 334,1809 367,1842 425,1842 430,1837 ; v1(509,172) v1(760,172) ; v1(573,1163) 814,1163 824.5,1173.5 824.5,1235.75 ; T4.2 824.5,1235.75 ; R22.1 v1(1014,1237) 1012.75,1235.75 824.5,1235.75 ; C16.1 1092,1600 1104,1600 1181.5,1522.5 T6.2 1181.5,1309.5 v1(1181,1309) ; U7.4 1760.39,1361.61 1787,1335 v1(1787,1331)
  Bottom Layer w40: P1.2 90.46,2247.36 67.03,2270.79 67.03,2355 ; CON1.5 185.14,2744.84 CON1.7 CON1.6 67.03,2355 ; C7.1 v1(463,2355.5) C10.1 67.53,2355.5 67.03,2355 ; v1(573,1163) 572,1164 500,1164 v1(451,1115) C12.2 R20.1 288,1052 230,994 87.43,994 64,970.57 64,903.84 SW3.1 61.57,807.43 162,707 v1(272,707) v1(625,707) ; v1(573,1317) 573,1428 647,1502 R16.1 R17.1 ; C2.2 v1(625,707) ; v1(651,2355) 651,2283 711,2223 C14.1 ; v1(804,67) 1306,67 1574.16,335.16 Q1.7 1867.16,335.16 P2.2 ; C9.2 945,2841 ; v1(1012,2927) 968.43,2927 945,2903.57 945,2841 ; v1(1128,2705) 1076.8,2756.2 1076.8,2830.5 C6.2 945,2841 ; R57.2 1224,707 ; U9.21@1228.58,2603.97 U9.20@1328.58,2603.97 ; C15.2 v1(1290,2440) ; v1(1446,1043) v1(1446,931) 1446,709 v1(1444,707) 1224,707 ; v1(1563,1159) 1615,1159 v1(1787,1331) ; C18.2 1787,2212 v1(1788,2211) v1(1788,2021) C8.1 ; C19.2@1673,1738 v1(1787,1738) ; C25.1 v1(1812,2350) 1812,2482.4 v1(1840.51,2510.92) ; v1(625,707) v1(931,707) 1224,707
HV_FEEDBACK: C4.1 R2.1 R4.2 U1.2 | length 588.2
  Top Layer w10: v1(560,645) 603.33,645 636.33,678 637.01,678 670,710.99 670,814 647,837 U1.2
  Top Layer w16: R4.2 C4.1 v1(560,645)
  Bottom Layer w16: R2.1 v1(560,645)
LCD_CD: R41.2 U8.38 U9.26 | length 742.5
  Top Layer w10: v1(960,2501) 1018,2443 v1(1018,2237)
  Bottom Layer w10: U9.26@728.58,2603.97 799.55,2533 928,2533 v1(960,2501) R41.2 ; v1@1023.95,2237 v1(1018,2237) 1056.42,2198.58 U8.38
LCD_CS: R43.2 U8.25 U9.28 | length 1156.9
  Top Layer w10: v1(715.23,2440) 809,2440 877,2372 877,1883 v1(924,1836)
  Bottom Layer w10: U9.28@528.58,2603.97 692.55,2440 R43.2 ; v1(924,1836) 924,1863 932.73,1871.73 U8.25
LCD_MOSI: R39.2 U8.28 U9.24 | length 1007.3
  Top Layer w10: v1(1142,2504) 1143.51,2502.49 1143.51,2060.51 v1(1145.03,2059)
  Bottom Layer w10: U9.24@928.58,2603.97 990.55,2542 1107,2542 1142,2507 R39.2 ; U8.28 1031.78,1930.79 1063.99,1963 1096.54,1963 1145.03,2011.48 v1(1145.03,2059)
LCD_RST: R42.2 U8.29 U9.27 | length 1029.4
  Top Layer w10: v1(870,2498) 912,2456 v1(912,1918)
  Bottom Layer w10: U9.27@628.58,2603.97 734.55,2498 v1(870,2498) R42.2 ; v1(912,1918) 912,1920.94 941.53,1950.47 U8.29
LCD_SCK: R40.2 U8.26 U9.25 | length 1013.2
  Top Layer w10: v1(1053,1911) v1@1053,2513
  Bottom Layer w10: U9.25@828.58,2603.97 878.55,2554 951,2554 990,2515 1052,2515 1052,2441 R40.2 ; U8.26 1033.42,1891.42 v1(1053,1911)
  other v1: 1052,2513
LDO_EN: U3.3 U5.7 | length 1057.6
  Bottom Layer w10: U5.7 265.41,1367.8 251,1382.2 251,1396.46 207.46,1440 158,1440 136,1462 136,1512 162,1538 202.46,1538 235,1570.54 235,1915 187,1963 187,1998 211,2022 299,2022 312.77,2008.23 U3.3
NetC12_1: C12.1 U5.3 | length 311.9
  Bottom Layer w10: C12.1 464,1205 497,1238 497,1321 475.8,1342.2 U5.3
NetC18_1: C18.1 U8.5 X1.2 | length 592
  Bottom Layer w10: U8.5 1422.47,2009.53 1433,1999 1508,1999 ; X1.2@1515.98,2122 X1.2 1506,2001 1508,1999 ; C18.1 1670.86,2121.86 1636.86,2121.86 1595,2080 1595,2042 1552,1999 1508,1999
NetC19_1: C19.1 U8.6 X1.1 | length 569.1
  Bottom Layer w10: U8.6 1405.14,1989.84 1505.48,1889.5 ; X1.1 1506,1889.5 1556.5,1889.5 1617,1829 C19.1
NetC25_2: C25.2 U9.15 | length 196.5
  Bottom Layer w10: C25.2 1750,2525.39 U9.15@1828.58,2603.97
NetC26_1: C26.1 U9.19 | length 539.2
  Bottom Layer w10: U9.19@1428.58,2603.97 1428.58,2388.42 1528,2289 1643,2289 1660,2306 C26.1
NetC26_2: C26.2 U9.16 | length 192.4
  Bottom Layer w10: C26.2 1660,2535.39 U9.16@1728.58,2603.97
NetC27_1: C27.1 U9.18 | length 301.1
  Bottom Layer w10: U9.18@1528.58,2603.97 1529,2603.55 1529,2525 1519,2515 1519,2364 1533,2350 C27.1
NetC27_2: C27.2 U9.17 | length 188.2
  Bottom Layer w10: C27.2 1570,2545.39 U9.17@1628.58,2603.97
NetC30_1: C30.1 U11.14 | length 3014.7
  Top Layer w10: U11.14 1135,1003 1353,1221 1780.91,1221 1867,1307.09 1867,2375.46 1735.65,2506.81 1664.93,2506.81 1580,2591.74 1580,2627.1 1424,2783.1 1424,2888 1408,2904 1202.02,2904 1196.16,2909.86 1196.16,2944.84 C30.1
NetC30_2: C30.2 R49.1 R52.1 U11.15 | length 3315.3
  Top Layer w10: U11.15 v1@1085,1003.83 ; v1@1085,1005 1328,1248 1782.46,1248 1849,1314.54 1849,2359.67 1781.17,2427.5 1673.5,2427.5 1571,2530 1494,2530 1479,2545 1479,2685 v1(1403,2761) ; C30.2 1194.5,2856.5 1194.5,2761 v1(1193,2761)
  Top Layer w16: C30.2 R49.1
  Bottom Layer w10: v1(1085.9,1003.83) 1122,967.73 R52.1 ; v1(1193,2761) 1194.86,2761 1209.86,2746 1386.14,2746 1401.14,2761 v1(1403,2761)
NetC31_1: C31.1 P2.1 R53.1 | length 1411
  Bottom Layer w40: R53.1 700,485 736,521 849,521 980,390 1135,390 C31.1 1282,537 1751,537 1816,472 P2.1
NetC31_2: C31.2 R55.2 | length 415.3
  Top Layer w16: C31.2 1526,389 1631,389 1725,483 R55.2
NetC32_1: C32.1 U11.6 | length 448.4
  Top Layer w16: U11.6 1285,784 1341,840 C32.1
NetC32_2: C32.2 R56.1 U11.7 | length 477.2
  Top Layer w16: U11.7 1336,709.78 1336,773 1353,790 1436,790 1467.01,758.99 1476,750 C32.2 R56.1
NetCON1_2: CON1.2 D5.1 | length 192.5
  Bottom Layer w10: CON1.2 218.61,2520.39 245.4,2493.6 D5.1
NetCON1_3: CON1.3 D5.3 | length 139.3
  Top Layer w16: CON1.3 329.63,2601.14 346.49,2618 v1(347,2618)
  Bottom Layer w16: v1(347,2618) 347,2572.13 D5.3
NetD1_2: D1.2 Q1.6 | length 522.9
  Top Layer w16: v1(736,422) 736,511 D1.2
  Bottom Layer w16: Q1.6 686.56,372.56 v1(736,422)
NetD2_1: D2.1 R3.2 | length 193.1
  Top Layer w10: D2.1 280,588 v1(280,642)
  Bottom Layer w10: R3.2 v1(280,642)
NetD4_1: D4.1 D6.1 R21.2 T5.1 | length 483.1
  Top Layer w16: D4.1 D6.1 ; T5.1 D6.1 ; R21.2 1614,2818 1477.63,2954.37 1477.63,2990.37 D6.1
NetD5_4: D5.4 R34.1 | length 784.7
  Bottom Layer w10: D5.4 478.6,2568.4 616,2431 616,1987 650,1953 R34.1
NetD5_6: D5.6 R32.1 | length 850.4
  Bottom Layer w10: D5.6 441.28,2470.72 460,2452 569.54,2452 598,2423.54 598,1901 636,1863 R32.1
NetD6_2: D6.2 U11.13 | length 2642.3
  Top Layer w10: U11.13 1185,1000 1381,1196 1781.37,1196 1885,1299.63 1885,2386.74 1685.58,2586.16 1685.58,2625.42 1652,2659 1597,2659 1475,2781 D6.2
NetD7_2: D7.2 R54.2 R55.1 T11.1 | length 463.1
  Top Layer w16: 1682.5,652.5 1685,650
  Top Layer w20: D7.2 1540,660 1550,650 R54.2 ; R55.1 1790,650 1817.5,677.5 T11.1
  Top Layer w40: R54.2 1685,650 R55.1
NetQ1_4: Q1.4 T1.2 T1.4 Z1.2 | length 946.9
  Top Layer w40: Z1.2 375,362 v1(420,317) ; T1.2 T1.4 737,320 v1(740,323)
  Bottom Layer w40: v1(420,317) 420.16,316.84 Q1.4 663.58,246.58 v1(740,323)
NetR1_1: R1.1 R2.2 | length 197.6
  Top Layer w16: v1(649,428) 650,429 R1.1
  Bottom Layer w16: R2.2 560,437.37 569.37,428 v1@648.63,428
NetR3_1: R3.1 Z1.1 | length 191.1
  Top Layer w10: v1(371,641) 371,587 Z1.1
  Bottom Layer w10: R3.1 370,640 v1(371,641)
NetR5_1: R5.1 T1.1 | length 793.4
  Top Layer w16: v1(164,380) 164,451 R5.1 ; v1(496,413) 495,412 495,260 543,212 543,157 514,128 T1.1
  Bottom Layer w16: v1(164,380) 197,413 v1(496,413)
NetR7_1: R7.1 R8.2 T2.1 | length 473.9
  Top Layer w16: T2.1 90.5,769.63 99.87,779 v1(194,779)
  Bottom Layer w16: v1(194,779) 249,779 267,797 339,797 338,798 R7.1
NetR7_2: R7.2 T2.3 U8.46 | length 3684.3
  Top Layer w10: v1(428,980) 926,980 1216,1270 1779,1270 1831,1322 1831,2045 1607,2269 1264,2269 v1(1214,2219)
  Top Layer w16: T2.3 219,726 233,740 233,925 288,980 v1(428,980)
  Bottom Layer w10: U8.46 1214,2139.55 v1(1214,2219)
  Bottom Layer w16: R7.2 v1(428,980)
NetR8_1: R8.1 U1.1 | length 211.6
  Top Layer w16: v1(503,886) 504,887 U1.1
  Bottom Layer w16: R8.1@429,797 485,797 503,815 v1(503,886)
NetR11_1: R11.1 R12.2 U8.18 | length 1478.9
  Top Layer w10: R12.2 R11.1 706,1809 1055,1460 1101,1460 1185,1544 1185,1720 v1(1187,1722)
  Bottom Layer w10: U8.18 1154.84,1740.75 1161.91,1733.68 1169.36,1733.68 1181.05,1722 v1(1187,1722)
NetR12_1: R12.1 U2.1 | length 295.5
  Top Layer w10: v1(223.61,1992.39) 277.39,1992.39 R12.1
  Bottom Layer w10: v1(223.61,1992.39) 223.61,1951.84 278.68,1896.77 U2.1
NetR13_1: R13.1 U2.5 | length 167.8
  Bottom Layer w10: R13.1 367,1719 392.6,1744.6 U2.5
NetR14_1: R14.1 T3.1 T4.3 | length 266.9
  Bottom Layer w10: R14.1 755.5,1204.5 T3.1 755.5,1354.5 779,1378 T4.3
NetR15_1: R15.1 R17.2 U8.12 | length 1146.9
  Top Layer w10: v1(914,1539) 914,1419 940,1393 1167.46,1393 1305,1530.54 v1(1305,1808)
  Bottom Layer w10: R15.1 R17.2 864,1592 914,1542 v1(914,1539) ; U8.12 1304.45,1808.55 v1(1305,1808)
NetR15_2: R15.2 T3.3 | length 488.5
  Top Layer w10: v1(641,1682) 595,1636 595,1425 v1(642,1378)
  Bottom Layer w10: v1(641,1682) R15.2 ; v1(642,1378) T3.3
NetR16_2: R16.2 T4.1 U8.13 | length 976.1
  Top Layer w10: v1(949,1431) 1180,1431 1253,1504 v1(1253,1719)
  Bottom Layer w10: R16.2 853,1502 899.5,1455.5 899.5,1430 ; T4.1 899.5,1430 ; v1(949,1431) 900.5,1431 899.5,1430 ; v1(1253,1719) 1253,1820.28 U8.13
NetR18_1: R18.1 U5.8 U8.17 | length 1402.4
  Top Layer w10: R18.1 368,1531 v1(369,1532) ; v1(854,1726) 919,1726 1132,1939 v1(1200,1939)
  Bottom Layer w10: U5.8 304.43,1416.26 316.17,1428 354,1428 369,1443 v1(369,1532) 417,1532 612,1727 853,1727 v1(854,1726) ; U8.17 1174.53,1876.76 1200,1902.23 v1(1200,1939)
NetR19_1: R19.1 R20.2 U5.1 | length 599.7
  Top Layer w10: v1(235.61,1241.61) 337.61,1241.61 410,1314 v1(410,1443) 295,1443 R19.1
  Bottom Layer w10: v1(235.61,1241.61) 236.36,1240.87 236.36,1210.86 242.21,1205 R20.2 ; U5.1 407.57,1440.57 v1(410,1443)
NetR26_2: R26.2 U7.7 | length 425.9
  Top Layer w10: v1(1587.2,1397.09) 1643,1452.89 v1(1643,1610)
  Bottom Layer w10: U7.7 1571.49,1412.8 v1(1587.2,1397.09) ; R26.2 1643,1534 v1(1643,1610)
NetR36_1: R36.1 T6.3 | length 121.5
  Bottom Layer w16: R36.1 T6.3
NetR36_2: R36.2 U9.2 U9.13 | length 1100
  Bottom Layer w40: U9.2@627.6,1102 U9.13@1727.6,1102
NetR48_1: R48.1 U8.3 | length 1247.1
  Top Layer w10: v1(1578,2728) R48.1
  Bottom Layer w10: U8.3 1375.9,2048.9 1385,2058 1385,2165.46 1472.78,2253.24 1636.63,2253.24 1705,2321.62 1705,2511 1777,2583 1777,2628 1677,2728 v1(1578,2728)
NetR48_2: R48.2 T9.1 | length 376.9
  Top Layer w16: R48.2 1812,2728 1813.37,2726.63 1839.01,2726.63 v1(1839.9,2725.75) ; v1@1763.5,2919 T9.1
  Bottom Layer w16: v1(1763,2919) 1763,2802.64 v1(1839.9,2725.75)
NetR49_2: R49.2 T9.3 | length 658.3
  Top Layer w16: R49.2 1280,3033 1365,3118 1649,3118 1695,3072 T9.3
NetR57_1: R57.1 T11.3 U11.10 | length 741.1
  Top Layer w16: U11.10 v2(1335,875) 1533,875 1594,936 v1(1595,936) ; v2(1761,971) 1824,971 1855,940 T11.3
  Bottom Layer w16: R57.1@1315,820 1315,855 v2(1335,875) ; v1(1595,936) 1630,971 v2(1761,971)
NetR58_2: R58.2 U8.10 U11.2 U11.5 | length 1776.1
  Top Layer w10: U11.5 1235,850.7 v1(1260,875.7) ; v1(1325,1048) 1325,1078 1402,1155 v1(1403,1155) ; v1(1422,1299) 1422,1871 v1(1423,1872)
  Top Layer w16: U11.2 1086.19,707.59 1086.19,659.81 1094,652 1231,652 ; U11.5 1235,656 1231,652 ; R58.2 1347.37,591.63 1304.37,591.63 1244,652 1231,652
  Bottom Layer w10: v1(1260,875.7) 1325,940.7 v1(1325,1048) ; U8.10 1383.9,1911.1 v1(1423,1872) ; v1(1403,1155) 1422,1174 v1(1422,1299)
NetT5_3: T5.3 U10.2 | length 169.3
  Top Layer w16: U10.2 1605,2908.11 T5.3
NetU5_2: U5.2 U8.19 | length 1300.5
  Top Layer w10: v1(630,1545) v1(849,1545) ; v1(1070,1497) 1158,1585 1158,1903.99 v1(1161.01,1906.99)
  Bottom Layer w10: U5.2 452.8,1367.8 v1(630,1545) ; v1(849,1545) 897,1497 v1(1070,1497) ; U8.19 1135.16,1869.16 1156.8,1890.8 1156.8,1902.78 v1(1161.01,1906.99)
NetU8_27: U8.27
ON_OFF: SW1.2 U5.5 | length 1046.9
  Bottom Layer w10: SW1.2 61.57,2020.43 97,1985 138,1985 217,1906 217,1587.67 189.16,1559.84 155.84,1559.84 118,1522 118,1454.54 150.54,1422 200,1422 233,1389 233,1337.23 253.61,1316.61 U5.5
SCL: R28.1 U7.6 U8.21 | length 687.2
  Bottom Layer w10: U8.21 1095.79,1770 1143.05,1722.74 1143.05,1687.51 1273,1557.56 1273,1437 1284,1426 R28.1 1378,1426 1416.8,1387.2 U7.6
SDA: R29.1 U7.5 U8.22 | length 791.3
  Bottom Layer w10: U8.22 1076.1,1762 1108.1,1730 1109,1730 1125.05,1713.95 1125.05,1680.05 1254,1551.1 1254,1363 1292,1325 1371,1325 1407.61,1361.61 U7.5
SWDCLK: P3.3 U8.37 | length 1141.7
  Top Layer w10: P3.3 862,3026 897,3026 953,2970 953,2728 879,2654 879,2533 961,2451 v1(961,2226)
  Bottom Layer w10: v1(961,2226) 962.84,2226 983.84,2205 1021.61,2205 1036.73,2189.88 U8.37
SWDIO: P3.4 U8.34 | length 1320.2
  Top Layer w10: P3.4 975,3013 975,2573 993,2555 1053,2555 1111,2497 1111,2020 v1(1111.77,2019.23)
  Bottom Layer w10: U8.34 1082.1,2048.9 v1(1111.77,2019.23)
SYS_BEEP: D4.2 U8.20 | length 1155.2
  Top Layer w10: v1(1204,1991) 1178,2017 1178,2450 1279,2551 1279,2689 1375,2785 D4.2
  Bottom Layer w10: U8.20 1115.47,1902.47 v1@1203.79,1990.79
SYS_RESET: P3.2 R31.2 U8.7 | length 1848.7
  Top Layer w10: P3.2 707,3022 779,2950 R31.2 856,2947 v1(915,2947) ; v1(1351,2237) 1382,2206 v1(1382,1959.79)
  Bottom Layer w10: v1(915,2947) 917.86,2947 931.86,2961 1145,2961 1164,2942 1164,2738 1184,2718 1330,2718 1378,2670 1378,2498 1409,2467 1409,2295 v1(1351,2237) ; U8.7 1365.68,1970.16 1376.05,1959.79 v1(1382,1959.79)
USB_D+: R34.2 R35.2 U8.33 | length 280.3
  Bottom Layer w10: R34.2 R35.2 802,2042 860,2042 872.79,2029.21 U8.33
USB_D-: R32.2 U8.32 | length 281.6
  Bottom Layer w10: R32.2 844,1863 863,1882 863,1944 928.53,2009.53 U8.32
pads on no net: CON1.4 H1.1 H2.1 H3.1 H4.1 Q1.1 Q1.3 Q1.5 Q1.8 SW1.3 SW1.4 SW2.3 SW2.4 SW3.3 SW3.4 U1.5 U1.6 U1.7 U3.4 U8.2 U8.4 U8.11 U8.14 U8.31 U8.39 U8.40 U8.41 U8.42 U8.43 U8.45 U11.4 U11.12

## Silkscreen, mask and mechanical layers (free items; w line width, h text height)
Mechanical 1:
  the board outline again, w10